# Altium PCB OTP.PcbDoc
Units mil, origin at the board's own origin, x right, y up, seen from the top; angles counter-clockwise.
Board outline 445 x 915 mil, 2 copper layers (Top Layer, Bottom Layer); 19 components, 16 nets, 89 pads, 17 vias.
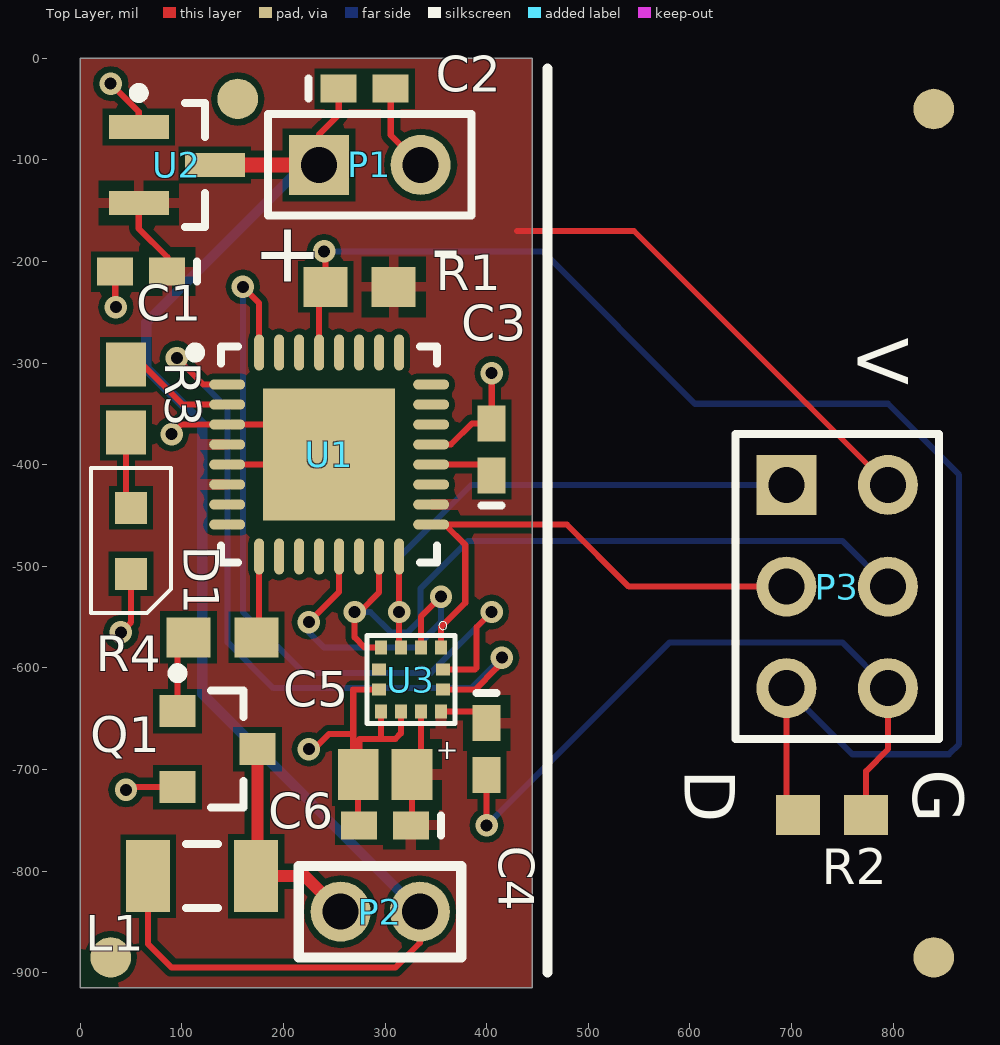
[diagram p0: Top Layer view]
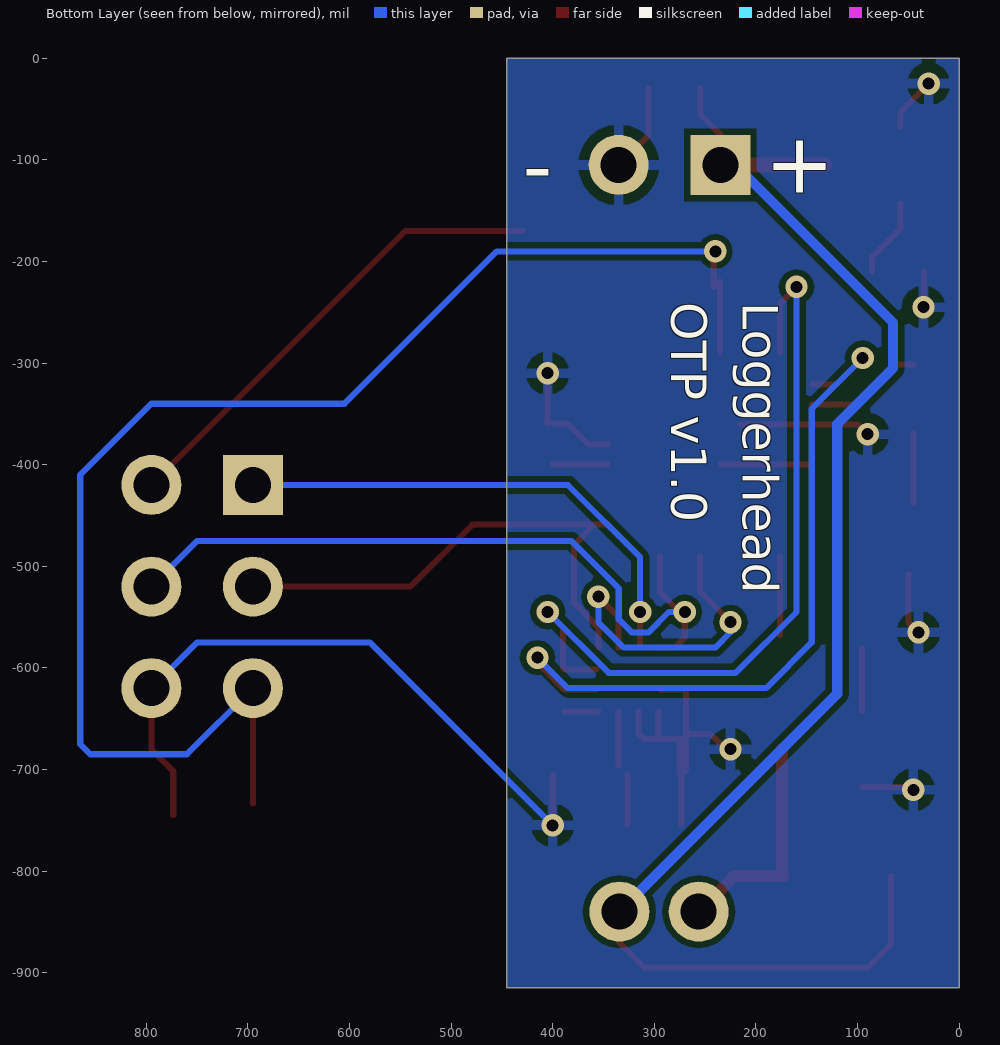
[diagram p1: Bottom Layer view, seen from below]

## Layer stack, top to bottom
Top Solder: solder mask 0.4, Solder Resist, Dk 3.5
Top Layer: signal copper 1.4
Dielectric 1: dielectric 12.6, FR-4, Dk 4.8
Bottom Layer: signal copper 1.4
Bottom Solder: solder mask 0.4, Solder Resist, Dk 3.5

## Board outline
0,-915 0,0 445,0 445,-915

## Design rules (kind name [scope] priority, off if disabled: settings)
Clearance [All] p1: gap=6
PolygonConnect [All] p1: connectstyle=Relief reliefconductorwidth=10 reliefentries=4 polygonreliefangle="90 Angle" airgapwidth=10
RoutingVias [All] p1: holewidth=11 width=22 viastyle="Through Hole" minholewidth=11 minwidth=22 maxholewidth=28 maxwidth=50
SolderMaskExpansion [All] p1: expansion=4
Width [All] p1: maxlimit=100 minlimit=6 preferedwidth=6
29 further rules are at their usual default settings.

## Components (designator, comment, footprint, x,y, rotation, side; value= is the part's Value field where it differs from the comment)
C1 "1.0uF" 0402 60,-210 r180 top
C2 "1.0uF" 0402 280,-30 r0 top
C3 "0.1uF" 0402 405,-385 r90 top
C4 "100nF" 0402 400,-680 r270 top
C5 "10uF" Tant0805 300,-705 r0 top
C6 "100nF" 0402 300,-755 r180 top
D1 "LED_0603" Diode0603 50,-475 r270 top
L1 "Inductor" INDC3216 120,-805 r180 top
P1 "Header 2" HDR1X2 235,-105 r0 top
P2 "HDR_2x1_2mm" HDR_2x1_2mm 335,-840 r90 top
P3 "AVR SPI" HDR2X3 695,-420 r270 top
Q1 "MMBTA06LT3G" ONSC-SOT-23-3-318-08_V 135,-680 r0 top
R1 "10k" 3-0603 275,-225 r0 top
R2 "omit" 3-0603 740,-745 r0 top
R3 "330" 3-0603 45,-335 r270 top
R4 "1k" 3-0603 140,-570 r180 top
U1 "ATmega8-16AC" 32M1-A_M 245,-390 r0 top
U2 "MCP1700T-1802E/TT" SOT-23-TT3_N 95,-105 r0 top
U3 "LIS2DS12" LGA-12 355,-580 r270 top

## Footprints (in the part's own frame and the unit in brackets; to place one, negate y for a bottom-side part, rotate by r counter-clockwise, add the part's x,y. Pads: shape width x height; smd on the part's side, far side on the other; paste and mask are expansions set on the pad)
3-0603 [mm] "Chip Resistor; Body 1.6 x 0.9 mm (LxW typ)"
  rect 1.1x1 smd: 1(-0.85,0) 2(0.85,0)
32M1-A_M [mm] "QFN, 32-Leads, Body 5x5mm, Pitch 0.5mm, Thermal Pad 3.3x3.3mm, IPC Low Density"
  oval 0.9x0.25 smd: 1(-2.55,1.75) 2(-2.55,1.25) 3(-2.55,0.75) 4(-2.55,0.25) 5(-2.55,-0.25) 6(-2.55,-0.75) 7(-2.55,-1.25) 8(-2.55,-1.75) 17(2.55,-1.75) 18(2.55,-1.25) 19(2.55,-0.75) 20(2.55,-0.25) 21(2.55,0.25) 22(2.55,0.75) 23(2.55,1.25) 24(2.55,1.75)
  oval 0.25x0.9 smd: 9(-1.75,-2.55) 10(-1.25,-2.55) 11(-0.75,-2.55) 12(-0.25,-2.55) 13(0.25,-2.55) 14(0.75,-2.55) 15(1.25,-2.55) 16(1.75,-2.55) 25(1.75,2.55) 26(1.25,2.55) 27(0.75,2.55) 28(0.25,2.55) 29(-0.25,2.55) 30(-0.75,2.55) 31(-1.25,2.55) 32(-1.75,2.55)
  rect 3.3x3.3 smd paste-1.27: 33(0,0)
  silkscreen extent -3.47,-2.7 2.7,2.7, body extent -2.55,-2.55 2.55,2.55, height 1
0402 [mm] "Chip Capacitor; Body 1.0 x 0.5 mm (LxW typ)"
  rect 0.9x0.7 smd: 1(-0.65,0) 2(0.65,0)
  silkscreen extent -1.4,-0.25 -1.4,0.25
Diode0603 [mm]
  rect 0.8x0.8 smd: A(-0.825,0) K(0.825,0)
  silkscreen extent -1.83,-1 1.8,1
HDR1X2 [mm] "Connector; Header; 2 Position"
  rect 1.5x1.5 hole 0.9: 1(0,0)
  round 1.5 hole 0.9: 2(2.54,0)
  silkscreen extent -1.27,-1.27 3.81,1.27
HDR2X3 [mm] "Connector; Header; 3x2 Position"
  rect 1.5x1.5 hole 0.9: 1(0,0)
  round 1.5 hole 0.9: 2(0,2.54) 3(2.54,0) 4(2.54,2.54) 5(5.08,0) 6(5.08,2.54)
  silkscreen extent -1.27,-1.27 6.35,3.81
HDR_2x1_2mm [mm]
  round 1.5 hole 0.9: 1(0,0.016) 2(0,2)
  silkscreen extent -1.14,-1.02 1.14,3.05
INDC3216 [mm] "Chip Inductor, Body 3.2x1.6mm, IPC High Density"
  rect 1.1x1.8 smd: 1(-1.35,0) 2(1.35,0)
  silkscreen extent -0.4,-0.8 0.4,0.8, body extent -1.7,-0.9 1.7,0.9, height 0.55
LGA-12 [mm] "LIS2DS12"
  rect 0.35x0.3 smd: 1(0,0) 2(0,-0.5) 3(0,-1) 4(0,-1.5) 7(1.6,-1.5) 8(1.6,-1) 9(1.6,-0.5) 10(1.6,0)
  rect 0.3x0.35 smd: 5(0.55,-1.55) 6(1.05,-1.55) 11(1.05,0.05) 12(0.55,0.05)
  silkscreen extent -0.65,-1.85 1.9,0.35
ONSC-SOT-23-3-318-08_V [mm] "SOT23, 3-Leads, Body 2.92x1.3mm, Pitch 0.95mm"
  rect 0.9x0.8 smd: 1(-1,0.95) 2(-1,-0.95) 3(1,0)
  silkscreen extent -1.12,-1.46 0.65,2.02, body extent -0.65,-1.46 0.65,1.46, height 1.11
SOT-23-TT3_N [mm] "SOT23, 3-Leads, Body 2.9x1.3mm, Pitch 0.95mm, Lead Span 2.4mm, IPC Medium Density"
  rect 1.5x0.6 smd: 1(-0.95,0.95) 2(-0.95,-0.95) 3(0.95,0)
  silkscreen extent -1.07,-1.55 0.7,1.92, body extent -0.7,-1.52 0.7,1.53, height 1.12
Tant0805 [mil]
  rect 40x50 smd: 1(-26.5,0) 2(26.5,0)

## Part data
C1 C2 C3 C4 C6: library part C0402, "Ceramic Chip Capacitor - Standard"
C5: library part Tant0805
P1: "Header, 2-Pin"
P3: library part "Header 3X2", "Header, 3-Pin, Dual row"
Q1: "Driver Transistor, NPN Silicon, 3-Pin SOT-23, Pb-Free, Tape and Reel"
R1 R2 R3 R4: library part ERJ3RK, "Precision Thick Film Chip Resistor, 10 Ohm to 1M Ohm Range, 1% and 0.5% Tolerance, 0603 Size, 0.063 W"
U1: "8-Bit AVR Microcontroller with 8K Bytes of In-System Programmable Flash Memory"
U2: "Low Quiescent Current LDO, 3-Pin SOT-23, Extended Temperature, Tape and Reel"

## Free pads (board coordinates)
  round 40 smd paste-20 mask+5: 0(30,-885) 0(155,-40) 0(840,-885) 0(840,-50)

## Via types
v1: diameter 22, hole 11.81, Top Layer to Bottom Layer, 17 vias

## Nets (pads, with @x,y where several pads share a name; then routed paths per layer and width w, separated by ;. In a path a pad name is that pad's centre, name@x,y a point inside that pad or via, vN(x,y) a via of type N, cw(c..) or ccw(c..) an arc to the next point about the centre after c; other vN are vias at no path point)
BAT: C2.1 L1.2 P1.1 P2.1 U2.3 | length 1471.1
  Top Layer w6: L1.2 66.85,-871.85 90,-895 310,-895 334.37,-870.63 P2.1 ; P1.1 235,-75 254.41,-55.59 C2.1
  Top Layer w15: U2.3 P1.1@210,-105
  Bottom Layer w6: P1.1@220,-105 P1.1
  Bottom Layer w10: P1.1@220,-105 65,-260 65,-305 120,-360 120,-625.63 P2.1
CS: U1.13 U3.2 | length 316.7
  Top Layer w6: v1(225,-555) 254.84,-525.16 U1.13 ; U3.2 335.32,-549.69 v1(355,-530)
  Bottom Layer w6: v1(225,-555) 225,-565 240,-580 330,-580 355,-555 v1(355,-530)
DTR: P3.5 R1.1 R2.1 U1.29 | length 1394.8
  Top Layer w6: U1.29 R1.1@235.16,-220 ; R1.1 241.54,-198.47 v1@243.69,-196.32 ; R2.1@695,-733.47 P3.5
  Bottom Layer w6: v1(240,-190) 455,-190 605,-340 795,-340 865,-410 865,-675 855,-685 760,-685 P3.5
GND: C1.2 C2.2 C3.2 C4.2 C5.1 C6.2 D1.K P1.2 P3.6 Q1.2 R2.2 U1.3 U1.5 U1.21 U1.33 U2.1 U3.6 U3.7 U3.8 | length 1620.3
  Top Layer w6: v1(30,-25) 57.6,-52.6 U2.1 ; v1@34.41,-244.41 C1.2 ; v1(40,-565) 50,-555 D1.K ; v1@47.6,-717.4 Q1.2 ; v1(90,-370) 99.53,-360.47 U1.3 U1.33@215.47,-360.47 ; U1.5 U1.33@235.16,-399.84 ; v1@227.5,-682.5 245,-665 265,-665 ; C6.2@273.5,-754.09 C5.1 ; U3.6 268.66,-621.34 268.66,-700.16 C5.1 ; 295.95,-669.06 U3.7 ; C2.2 305.59,-75.59 P1.2 ; U3.8 315.63,-664.37 310,-670 275,-670 275,-703.5 C5.1 ; U1.21 364.84,-380.16 385.59,-359.41 C3.2@400,-359.41 ; v1(400,-755) C4.2 ; C3.2 v1(405,-310) ; R2.2 773.47,-701.54 795,-680 P3.6
  Bottom Layer w6: v1(400,-755) 580,-575 750,-575 P3.6
  other v1: 45,-720 225,-680 35,-245
INT1: U1.32 U3.12 | length 780.9
  Top Layer w6: v1(160,-225) 176.1,-241.1 U1.32 ; U3.12 388.35,-601.65 390,-600 390,-560 v1(405,-545)
  Bottom Layer w6: v1(160,-225) 160,-545 220,-605 345,-605 v1(405,-545)
INT2: U1.1 U3.11 | length 739.1
  Top Layer w6: v1(95,-295) 121.1,-321.1 U1.1 ; U3.11 388.66,-621.34 410,-600 v1@410,-585
  Bottom Layer w6: v1(95,-295) 145,-345 145,-575 190,-620 385,-620 v1(415,-590)
LED1: R3.1 U1.2 | length 115.9
  Top Layer w6: R3.1 61.54,-301.54 100.79,-340.79 U1.2
MISO: P3.1 U1.16 U3.3 | length 554.8
  Top Layer w6: U1.16 v1(313.9,-545) 313.9,-578.27 U3.3
  Bottom Layer w6: v1(313.9,-545) 313.9,-491.1 385,-420 P3.1
MOSI: P3.4 U1.15 U3.4 | length 729.7
  Top Layer w6: U1.15 294.21,-525.79 275,-545 v1(270,-545) 270,-570 280,-580 U3.4
  Bottom Layer w6: v1(270,-545) 285.61,-545 305.61,-565 322.18,-565 335,-552.18 335,-521.72 381.72,-475 750,-475 P3.4
NetC3_1: C3.1 U1.20 | length 55.4
  Top Layer w6: U1.20 C3.1@400.75,-399.84
NetD1_A: D1.A R3.2 | length 69.1
  Top Layer w6: D1.A@45,-437.52 R3.2
NetQ1_1: Q1.1 R4.2 | length 61.7
  Top Layer w6: Q1.1 R4.2@95.63,-580.91
PIEZO: L1.1 P2.2 Q1.3 | length 221.4
  Top Layer w12: L1.1 221.26,-805 P2.2 ; L1.1@174.37,-803.78 Q1.3
PWM: R4.1 U1.9 | length 77
  Top Layer w6: R4.1@176.1,-567.36 U1.9
SCK: P3.3 U1.17 U3.1 | length 514.2
  Top Layer w6: U1.17 U1.17@358.9,-458.9 ; U3.1 355,-560 378.9,-536.1 378.9,-478.9 U1.17@358.9,-458.9 ; P3.3 540,-520 478.9,-458.9 U1.17@358.9,-458.9
V1.8: C1.1 C4.1 C5.2 C6.1 P3.2 R1.2 U1.4 U1.6 U1.18 U2.2 U3.9 U3.10 | length 683.6
  Top Layer w6: U2.2 57.6,-167.6 85.59,-195.59 C1.1 ; C6.1@326.5,-754.09 C5.2 ; C5.2@335.32,-696.19 U3.9 ; U3.10 C4.1@388.58,-642.99 ; 430,-170 545,-170 P3.2
pads on no net: U1.7 U1.8 U1.10 U1.11 U1.12 U1.14 U1.19 U1.22 U1.23 U1.24 U1.25 U1.26 U1.27 U1.28 U1.30 U1.31 U3.5

## Polygon pours and split planes (outlines as drawn)
V1.8 on Top Layer "V1.8" (solid, pour order 2): 0,0 445,0 445,-915 0,-915
GND on Bottom Layer "GND" (solid, pour order 6): 0,0 445,0 445,-915 0,-915

## Silkscreen, mask and mechanical layers (free items; w line width, h text height)
Top Overlay:
  lines w10: 460,-900 460,-10
  text "-" at 345,-215 h60
  text "+" at 170,-220 h60
Bottom Overlay:
  text "+" at 122.56,-132.56 h60
  text "-" at 400,-135 h60
  text "Loggerhead" at 225,-240 h60 r90
  text "OTP v1.0" at 295,-240 h60 r90
Mechanical 1:
  lines w10: 0,-915 0,0 890,0 890,-915 0,-915

## Text inside footprints (layer, text, board x,y; h text height)
C5: Top Overlay "+" at 350,-690 h19.68
P3: Top Overlay "G" at 820,-700 h50 r270; Top Overlay "D" at 595,-700 h50 r270; Top Overlay "V" at 765,-275 h50 r270